# EAGLE board 00B-002-A1-01 (EAGLE 9.6.2)
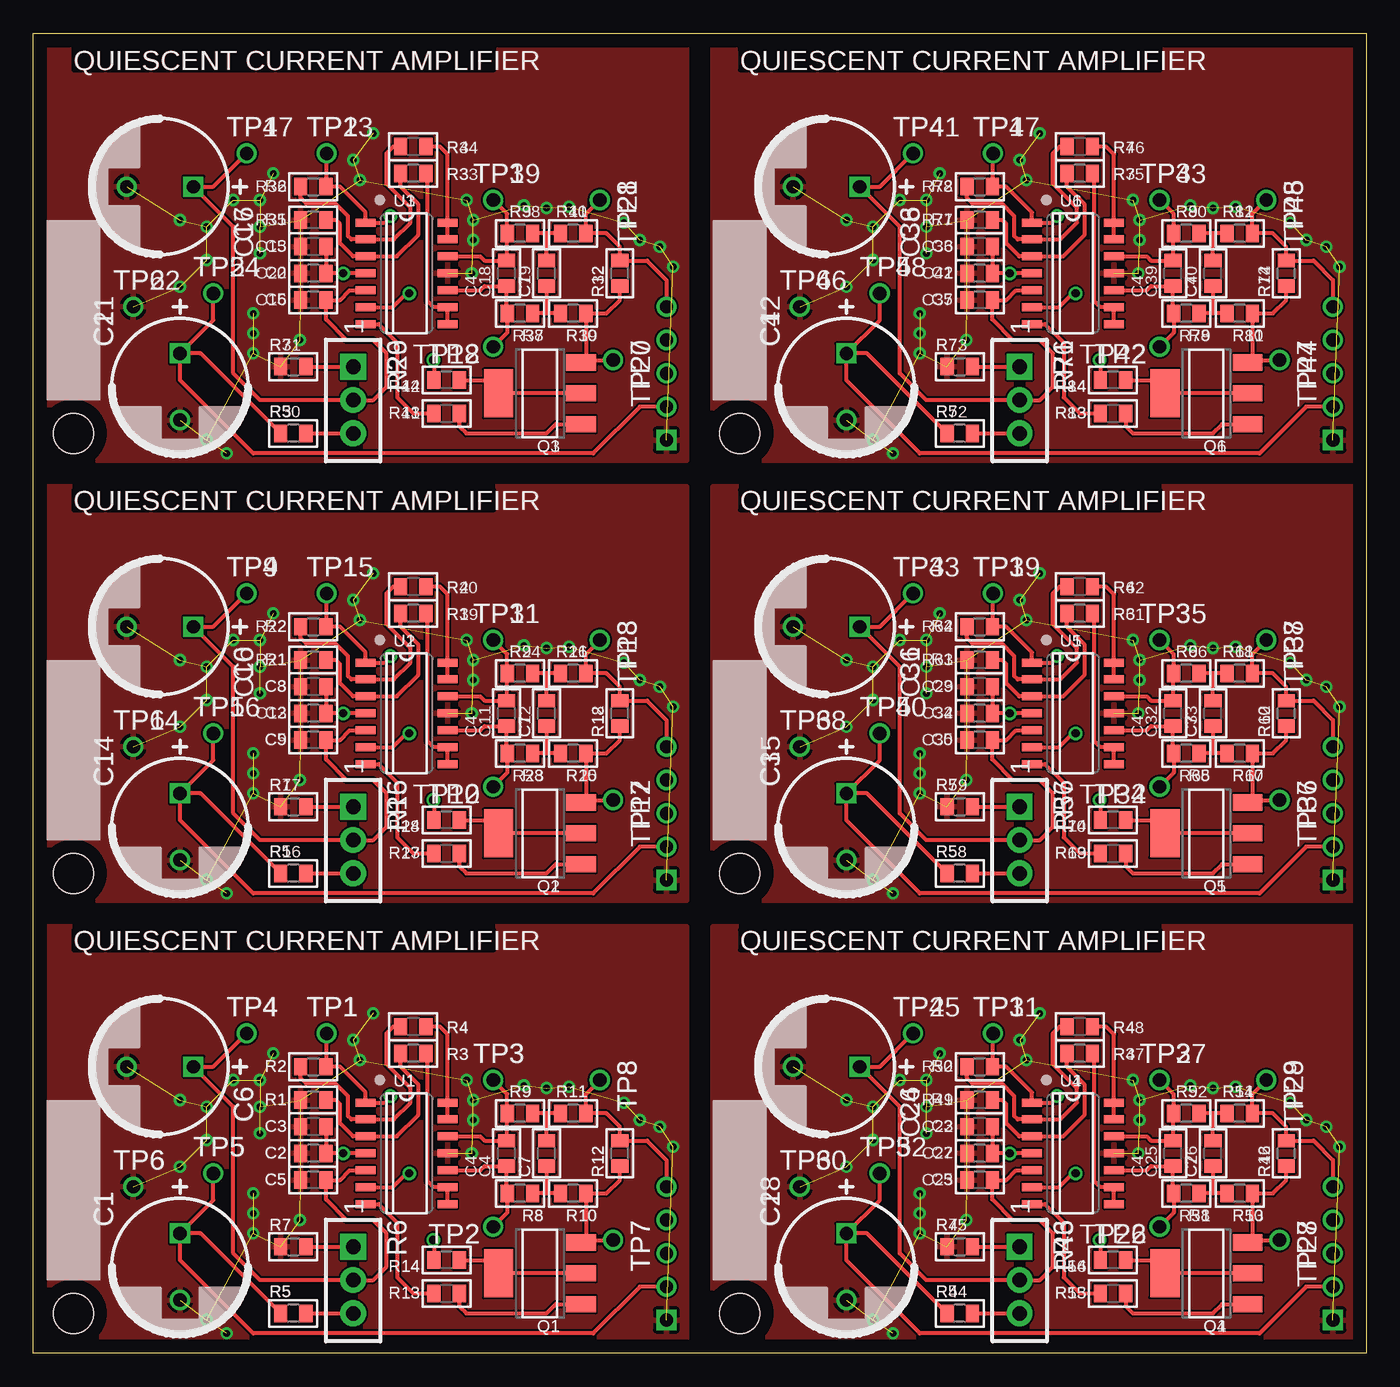
[diagram p0: board, top side]
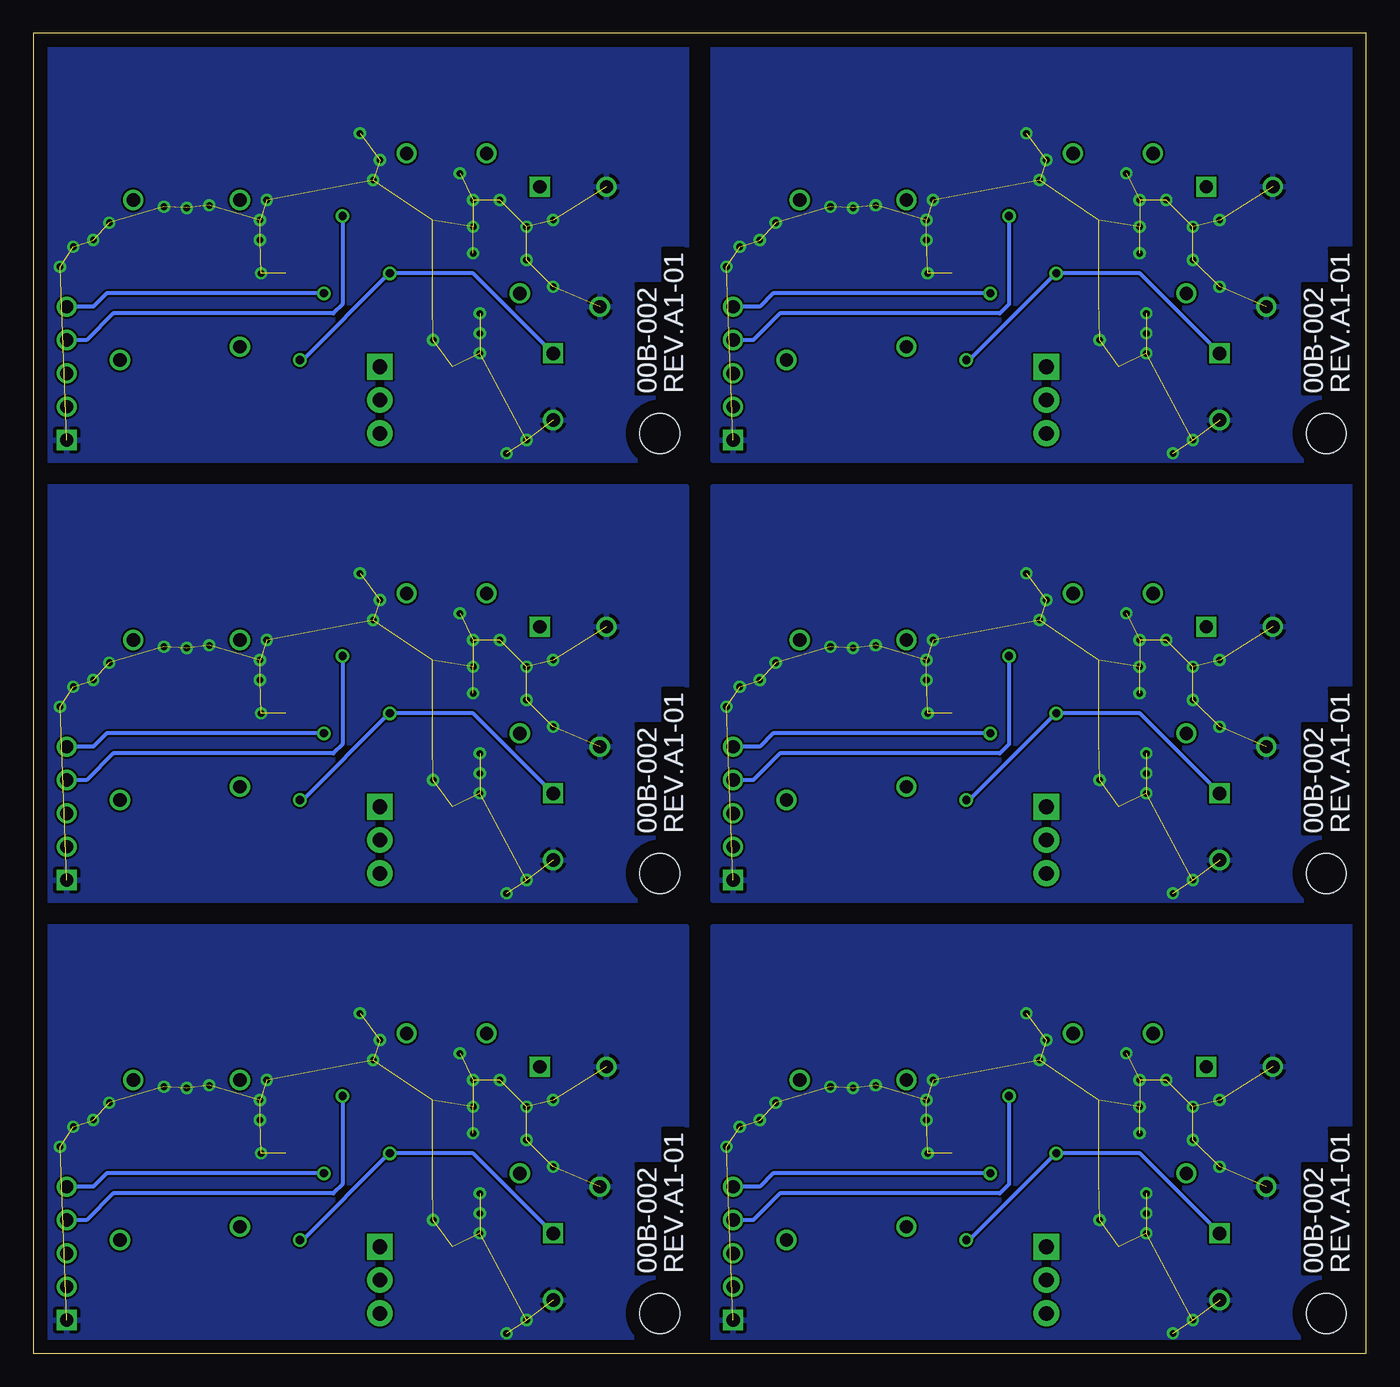
[diagram p1: board, bottom side, seen from below]

Size 100 x 99 mm. Coordinates in mm from the lower left corner, seen from the top.
Outline: 0,0 0,99 100,99 100,0 0,0
Copper layers (1*16): Top 0.035mm / dielectric 1.5mm / Bottom 0.035mm
Design rules "default": minimum track width 6mil, minimum drill 0.35mm, track to track 6mil, track to pad 6mil, pad to pad 6mil, via to via 6mil, smd to smd 6mil, copper to edge 40mil, drill to drill 6mil, minimum pad ring 10mil, minimum via ring 8mil, stop-mask expansion 4mil, vias tented up to drill 0mil, thermal gap 10mil

## Footprints (pad centres in the part's own frame; a part is rotated, then mirrored left to right if it is on the bottom)
C5MM = drill 1 square: + -2.5,0 | drill 1: - 2.5,0
C0805 = smd 1 x 1.3: 1 -0.95,0; 2 0.95,0
PINS_1X5 = drill 1 square: 1 0,0 | drill 1: 2 2.5,0; 3 5,0; 4 7.5,0; 5 10,0
MINIPCB_0P_33X50 = hole 3: 3,3
SOT223 = smd 1.219 x 2.235: 1 -2.311,-3.099; 2 0,-3.099; 3 2.311,-3.099 | smd 3.6 x 2.2: 4.TAB 0,3.099
R0805 = smd 1 x 1.3: 1 -0.95,0; 2 0.95,0
TRIM_0100 = drill 1.1 pad 1.93 square: 1 0,0 | drill 1.1 pad 1.93: 2 2.5,0; 3 5,0
PINS_1_TESTPOINT_KE5000_NOTEXT = drill 1: 1 0,0
SO14 = smd 0.6 x 1.5: 1 -3.81,-3.073; 2 -2.54,-3.073; 3 -1.27,-3.073; 4 0,-3.073; 5 1.27,-3.073; 6 2.54,-3.073; 7 3.81,-3.073; 8 3.81,3.073; 9 2.54,3.073; 10 1.27,3.073; 11 0,3.073; 12 -1.27,3.073; 13 -2.54,3.073; 14 -3.81,3.073

## Placement (x,y rotation side)
C1  1u  [C5MM]  11,6.5 270 top
C2  1u  [C0805]  21,15 180 top
C3  1u  [C0805]  21,17 180 top
C4  [C0805]  35.5,15 90 top
C5  [C0805]  21,13 180 top
C6  [C5MM]  9.5,21.5 180 top
C7  [C0805]  38.5,15 90 top
C8  1u  [C0805]  21,50 180 top
C9  [C0805]  21,46 180 top
C10  [C5MM]  9.5,54.5 180 top
C11  [C0805]  35.5,48 90 top
C12  [C0805]  38.5,48 90 top
C13  1u  [C0805]  21,48 180 top
C14  1u  [C5MM]  11,39.5 270 top
C15  1u  [C0805]  21,83 180 top
C16  [C0805]  21,79 180 top
C17  [C5MM]  9.5,87.5 180 top
C18  [C0805]  35.5,81 90 top
C19  [C0805]  38.5,81 90 top
C20  1u  [C0805]  21,81 180 top
C21  1u  [C5MM]  11,72.5 270 top
C22  1u  [C0805]  71,17 180 top
C23  [C0805]  71,13 180 top
C24  [C5MM]  59.5,21.5 180 top
C25  [C0805]  85.5,15 90 top
C26  [C0805]  88.5,15 90 top
C27  1u  [C0805]  71,15 180 top
C28  1u  [C5MM]  61,6.5 270 top
C29  1u  [C0805]  71,50 180 top
C30  [C0805]  71,46 180 top
C31  [C5MM]  59.5,54.5 180 top
C32  [C0805]  85.5,48 90 top
C33  [C0805]  88.5,48 90 top
C34  1u  [C0805]  71,48 180 top
C35  1u  [C5MM]  61,39.5 270 top
C36  1u  [C0805]  71,83 180 top
C37  [C0805]  71,79 180 top
C38  [C5MM]  59.5,87.5 180 top
C39  [C0805]  85.5,81 90 top
C40  [C0805]  88.5,81 90 top
C41  1u  [C0805]  71,81 180 top
C42  1u  [C5MM]  61,72.5 270 top
P1  [PINS_1X5]  47.5,2.5 90 top
P2  [PINS_1X5]  47.5,35.5 90 top
P3  [PINS_1X5]  47.5,68.5 90 top
P4  [PINS_1X5]  97.5,2.5 90 top
P5  [PINS_1X5]  97.5,35.5 90 top
P6  [PINS_1X5]  97.5,68.5 90 top
PCB1  [MINIPCB_0P_33X50]  0,0 0 top
PCB2  [MINIPCB_0P_33X50]  0,33 0 top
PCB3  [MINIPCB_0P_33X50]  0,66 0 top
PCB4  [MINIPCB_0P_33X50]  50,0 0 top
PCB5  [MINIPCB_0P_33X50]  50,33 0 top
PCB6  [MINIPCB_0P_33X50]  50,66 0 top
Q1  [SOT223]  38,6 90 top
Q2  [SOT223]  38,39 90 top
Q3  [SOT223]  38,72 90 top
Q4  [SOT223]  88,6 90 top
Q5  [SOT223]  88,39 90 top
Q6  [SOT223]  88,72 90 top
R1  [R0805]  21,19 180 top
R2  [R0805]  21,21.5 0 top
R3  [R0805]  28.5,22.5 180 top
R4  [R0805]  28.5,24.5 180 top
R5  [R0805]  19.5,3 180 top
R6  [TRIM_0100]  24,8 270 top
R7  [R0805]  19.5,8 0 top
R8  [R0805]  36.5,12 180 top
R9  [R0805]  36.5,18 180 top
R10  [R0805]  40.5,12 180 top
R11  [R0805]  40.5,18 180 top
R12  [R0805]  44,15 90 top
R13  [R0805]  31,4.5 0 top
R14  [R0805]  31,7 180 top
R15  [TRIM_0100]  24,41 270 top
R16  [R0805]  19.5,36 180 top
R17  [R0805]  19.5,41 0 top
R18  [R0805]  44,48 90 top
R19  [R0805]  28.5,55.5 180 top
R20  [R0805]  28.5,57.5 180 top
R21  [R0805]  21,52 180 top
R22  [R0805]  21,54.5 0 top
R23  [R0805]  36.5,45 180 top
R24  [R0805]  36.5,51 180 top
R25  [R0805]  40.5,45 180 top
R26  [R0805]  40.5,51 180 top
R27  [R0805]  31,37.5 0 top
R28  [R0805]  31,40 180 top
R29  [TRIM_0100]  24,74 270 top
R30  [R0805]  19.5,69 180 top
R31  [R0805]  19.5,74 0 top
R32  [R0805]  44,81 90 top
R33  [R0805]  28.5,88.5 180 top
R34  [R0805]  28.5,90.5 180 top
R35  [R0805]  21,85 180 top
R36  [R0805]  21,87.5 0 top
R37  [R0805]  36.5,78 180 top
R38  [R0805]  36.5,84 180 top
R39  [R0805]  40.5,78 180 top
R40  [R0805]  40.5,84 180 top
R41  [R0805]  31,70.5 0 top
R42  [R0805]  31,73 180 top
R43  [TRIM_0100]  74,8 270 top
R44  [R0805]  69.5,3 180 top
R45  [R0805]  69.5,8 0 top
R46  [R0805]  94,15 90 top
R47  [R0805]  78.5,22.5 180 top
R48  [R0805]  78.5,24.5 180 top
R49  [R0805]  71,19 180 top
R50  [R0805]  71,21.5 0 top
R51  [R0805]  86.5,12 180 top
R52  [R0805]  86.5,18 180 top
R53  [R0805]  90.5,12 180 top
R54  [R0805]  90.5,18 180 top
R55  [R0805]  81,4.5 0 top
R56  [R0805]  81,7 180 top
R57  [TRIM_0100]  74,41 270 top
R58  [R0805]  69.5,36 180 top
R59  [R0805]  69.5,41 0 top
R60  [R0805]  94,48 90 top
R61  [R0805]  78.5,55.5 180 top
R62  [R0805]  78.5,57.5 180 top
R63  [R0805]  71,52 180 top
R64  [R0805]  71,54.5 0 top
R65  [R0805]  86.5,45 180 top
R66  [R0805]  86.5,51 180 top
R67  [R0805]  90.5,45 180 top
R68  [R0805]  90.5,51 180 top
R69  [R0805]  81,37.5 0 top
R70  [R0805]  81,40 180 top
R71  [TRIM_0100]  74,74 270 top
R72  [R0805]  69.5,69 180 top
R73  [R0805]  69.5,74 0 top
R74  [R0805]  94,81 90 top
R75  [R0805]  78.5,88.5 180 top
R76  [R0805]  78.5,90.5 180 top
R77  [R0805]  71,85 180 top
R78  [R0805]  71,87.5 0 top
R79  [R0805]  86.5,78 180 top
R80  [R0805]  86.5,84 180 top
R81  [R0805]  90.5,78 180 top
R82  [R0805]  90.5,84 180 top
R83  [R0805]  81,70.5 0 top
R84  [R0805]  81,73 180 top
TP1  [PINS_1_TESTPOINT_KE5000_NOTEXT]  22,24 0 top
TP2  [PINS_1_TESTPOINT_KE5000_NOTEXT]  34.5,9.5 180 top
TP3  [PINS_1_TESTPOINT_KE5000_NOTEXT]  34.5,20.5 0 top
TP4  [PINS_1_TESTPOINT_KE5000_NOTEXT]  16,24 0 top
TP5  [PINS_1_TESTPOINT_KE5000_NOTEXT]  13.5,13.5 0 top
TP6  [PINS_1_TESTPOINT_KE5000_NOTEXT]  7.5,12.5 0 top
TP7  [PINS_1_TESTPOINT_KE5000_NOTEXT]  43.5,8.5 270 top
TP8  [PINS_1_TESTPOINT_KE5000_NOTEXT]  42.5,20.5 270 top
TP9  [PINS_1_TESTPOINT_KE5000_NOTEXT]  16,57 0 top
TP10  [PINS_1_TESTPOINT_KE5000_NOTEXT]  34.5,42.5 180 top
TP11  [PINS_1_TESTPOINT_KE5000_NOTEXT]  34.5,53.5 0 top
TP12  [PINS_1_TESTPOINT_KE5000_NOTEXT]  43.5,41.5 270 top
TP13  [PINS_1_TESTPOINT_KE5000_NOTEXT]  42.5,53.5 270 top
TP14  [PINS_1_TESTPOINT_KE5000_NOTEXT]  7.5,45.5 0 top
TP15  [PINS_1_TESTPOINT_KE5000_NOTEXT]  22,57 0 top
TP16  [PINS_1_TESTPOINT_KE5000_NOTEXT]  13.5,46.5 0 top
TP17  [PINS_1_TESTPOINT_KE5000_NOTEXT]  16,90 0 top
TP18  [PINS_1_TESTPOINT_KE5000_NOTEXT]  34.5,75.5 180 top
TP19  [PINS_1_TESTPOINT_KE5000_NOTEXT]  34.5,86.5 0 top
TP20  [PINS_1_TESTPOINT_KE5000_NOTEXT]  43.5,74.5 270 top
TP21  [PINS_1_TESTPOINT_KE5000_NOTEXT]  42.5,86.5 270 top
TP22  [PINS_1_TESTPOINT_KE5000_NOTEXT]  7.5,78.5 0 top
TP23  [PINS_1_TESTPOINT_KE5000_NOTEXT]  22,90 0 top
TP24  [PINS_1_TESTPOINT_KE5000_NOTEXT]  13.5,79.5 0 top
TP25  [PINS_1_TESTPOINT_KE5000_NOTEXT]  66,24 0 top
TP26  [PINS_1_TESTPOINT_KE5000_NOTEXT]  84.5,9.5 180 top
TP27  [PINS_1_TESTPOINT_KE5000_NOTEXT]  84.5,20.5 0 top
TP28  [PINS_1_TESTPOINT_KE5000_NOTEXT]  93.5,8.5 270 top
TP29  [PINS_1_TESTPOINT_KE5000_NOTEXT]  92.5,20.5 270 top
TP30  [PINS_1_TESTPOINT_KE5000_NOTEXT]  57.5,12.5 0 top
TP31  [PINS_1_TESTPOINT_KE5000_NOTEXT]  72,24 0 top
TP32  [PINS_1_TESTPOINT_KE5000_NOTEXT]  63.5,13.5 0 top
TP33  [PINS_1_TESTPOINT_KE5000_NOTEXT]  66,57 0 top
TP34  [PINS_1_TESTPOINT_KE5000_NOTEXT]  84.5,42.5 180 top
TP35  [PINS_1_TESTPOINT_KE5000_NOTEXT]  84.5,53.5 0 top
TP36  [PINS_1_TESTPOINT_KE5000_NOTEXT]  93.5,41.5 270 top
TP37  [PINS_1_TESTPOINT_KE5000_NOTEXT]  92.5,53.5 270 top
TP38  [PINS_1_TESTPOINT_KE5000_NOTEXT]  57.5,45.5 0 top
TP39  [PINS_1_TESTPOINT_KE5000_NOTEXT]  72,57 0 top
TP40  [PINS_1_TESTPOINT_KE5000_NOTEXT]  63.5,46.5 0 top
TP41  [PINS_1_TESTPOINT_KE5000_NOTEXT]  66,90 0 top
TP42  [PINS_1_TESTPOINT_KE5000_NOTEXT]  84.5,75.5 180 top
TP43  [PINS_1_TESTPOINT_KE5000_NOTEXT]  84.5,86.5 0 top
TP44  [PINS_1_TESTPOINT_KE5000_NOTEXT]  93.5,74.5 270 top
TP45  [PINS_1_TESTPOINT_KE5000_NOTEXT]  92.5,86.5 270 top
TP46  [PINS_1_TESTPOINT_KE5000_NOTEXT]  57.5,78.5 0 top
TP47  [PINS_1_TESTPOINT_KE5000_NOTEXT]  72,90 0 top
TP48  [PINS_1_TESTPOINT_KE5000_NOTEXT]  63.5,79.5 0 top
U1  324  [SO14]  28,15 270 top
U2  324  [SO14]  28,48 270 top
U3  324  [SO14]  28,81 270 top
U4  324  [SO14]  78,15 270 top
U5  324  [SO14]  78,48 270 top
U6  324  [SO14]  78,81 270 top

## Library data of the parts
C1-C42 P1-P6 Q1-Q6 R1-R84 TP1-TP48 U1-U6 = minipcb
PCB1-PCB6 = minipcb; PART_NUMBER: 00B-002; REVISION: A1-01; TITLE: QUIESCENT CURRENT AMPLIFIER

## Nets
GND: C1.- C2.2 C3.2 C5.2 C6.- P1.1 R1.2 R7.1 TP6.1 U1.11
GND1: C8.2 C9.2 C10.- C13.2 C14.- P2.1 R17.1 R21.2 TP14.1 U2.11
GND2: C15.2 C16.2 C17.- C20.2 C21.- P3.1 R31.1 R35.2 TP22.1 U3.11
GND3: C22.2 C23.2 C24.- C27.2 C28.- P4.1 R45.1 R49.2 TP30.1 U4.11
GND4: C29.2 C30.2 C31.- C34.2 C35.- P5.1 R59.1 R63.2 TP38.1 U5.11
GND5: C36.2 C37.2 C38.- C41.2 C42.- P6.1 R73.1 R77.2 TP46.1 U6.11
ISIGNAL: P1.4 R2.2 TP1.1 U1.1
ISIGNAL1: P2.4 R22.2 TP15.1 U2.1
ISIGNAL2: P3.4 R36.2 TP23.1 U3.1
ISIGNAL3: P4.4 R50.2 TP31.1 U4.1
ISIGNAL4: P5.4 R64.2 TP39.1 U5.1
ISIGNAL5: P6.4 R78.2 TP47.1 U6.1
N$1: Q1.2 Q1.4.TAB R14.1
N$2: R3.1 U1.8 U1.9
N$3: R4.1 U1.13 U1.14
N$4: Q1.1 R13.2
N$5: R6.1 R7.2
N$6: R5.1 R6.3
N$7: R13.1 U1.7
N$8: R2.1 R4.2 U1.2
N$9: R1.1 R3.2 U1.3
N$10: R15.1 R17.2
N$11: R15.3 R16.1
N$12: R19.1 U2.8 U2.9
N$13: R20.1 U2.13 U2.14
N$14: C4.1 R8.2 TP2.1 U1.10
N$15: C4.2 R9.2 TP3.1 U1.12
N$16: C7.1 R8.1 R10.2
N$17: C7.2 R9.1 R11.2
N$18: R20.2 R22.1 U2.2
N$19: R19.2 R21.1 U2.3
N$20: C11.1 R23.2 TP10.1 U2.10
N$21: C11.2 R24.2 TP11.1 U2.12
N$22: C12.1 R23.1 R25.2
N$23: C12.2 R24.1 R26.2
N$24: Q2.1 R27.2
N$25: R27.1 U2.7
N$26: Q2.2 Q2.4.TAB R28.1
N$27: R29.1 R31.2
N$28: R29.3 R30.1
N$29: R33.1 U3.8 U3.9
N$30: R34.1 U3.13 U3.14
N$31: R34.2 R36.1 U3.2
N$32: R33.2 R35.1 U3.3
N$33: C18.1 R37.2 TP18.1 U3.10
N$34: C18.2 R38.2 TP19.1 U3.12
N$35: C19.1 R37.1 R39.2
N$36: C19.2 R38.1 R40.2
N$37: Q3.1 R41.2
N$38: R41.1 U3.7
N$39: Q3.2 Q3.4.TAB R42.1
N$40: R43.1 R45.2
N$41: R43.3 R44.1
N$42: R47.1 U4.8 U4.9
N$43: R48.1 U4.13 U4.14
N$44: R48.2 R50.1 U4.2
N$45: R47.2 R49.1 U4.3
N$46: C25.1 R51.2 TP26.1 U4.10
N$47: C25.2 R52.2 TP27.1 U4.12
N$48: C26.1 R51.1 R53.2
N$49: C26.2 R52.1 R54.2
N$50: Q4.1 R55.2
N$51: R55.1 U4.7
N$52: Q4.2 Q4.4.TAB R56.1
N$53: R57.1 R59.2
N$54: R57.3 R58.1
N$55: R61.1 U5.8 U5.9
N$56: R62.1 U5.13 U5.14
N$57: R62.2 R64.1 U5.2
N$58: R61.2 R63.1 U5.3
N$59: C32.1 R65.2 TP34.1 U5.10
N$60: C32.2 R66.2 TP35.1 U5.12
N$61: C33.1 R65.1 R67.2
N$62: C33.2 R66.1 R68.2
N$63: Q5.1 R69.2
N$64: R69.1 U5.7
N$65: Q5.2 Q5.4.TAB R70.1
N$66: R71.1 R73.2
N$67: R71.3 R72.1
N$68: R75.1 U6.8 U6.9
N$69: R76.1 U6.13 U6.14
N$70: R76.2 R78.1 U6.2
N$71: R75.2 R77.1 U6.3
N$72: C39.1 R79.2 TP42.1 U6.10
N$73: C39.2 R80.2 TP43.1 U6.12
N$74: C40.1 R79.1 R81.2
N$75: C40.2 R80.1 R82.2
N$76: Q6.1 R83.2
N$77: R83.1 U6.7
N$78: Q6.2 Q6.4.TAB R84.1
V+: C1.+ C2.1 C3.1 P1.2 R5.2 R14.2 TP5.1 U1.4
V+1: C8.1 C13.1 C14.+ P2.2 R16.2 R28.2 TP16.1 U2.4
V+2: C15.1 C20.1 C21.+ P3.2 R30.2 R42.2 TP24.1 U3.4
V+3: C22.1 C27.1 C28.+ P4.2 R44.2 R56.2 TP32.1 U4.4
V+4: C29.1 C34.1 C35.+ P5.2 R58.2 R70.2 TP40.1 U5.4
V+5: C36.1 C41.1 C42.+ P6.2 R72.2 R84.2 TP48.1 U6.4
VOUT: P1.5 R11.1 R12.2 TP8.1 U1.6
VOUT1: P2.5 R18.2 R26.1 TP13.1 U2.6
VOUT2: P3.5 R32.2 R40.1 TP21.1 U3.6
VOUT3: P4.5 R46.2 R54.1 TP29.1 U4.6
VOUT4: P5.5 R60.2 R68.1 TP37.1 U5.6
VOUT5: P6.5 R74.2 R82.1 TP45.1 U6.6
VREF: C5.1 C6.+ R6.2 TP4.1 U1.5
VREF1: C9.1 C10.+ R15.2 TP9.1 U2.5
VREF2: C16.1 C17.+ R29.2 TP17.1 U3.5
VREF3: C23.1 C24.+ R43.2 TP25.1 U4.5
VREF4: C30.1 C31.+ R57.2 TP33.1 U5.5
VREF5: C37.1 C38.+ R71.2 TP41.1 U6.5
VSIGAL: Q1.3 R10.1 R12.1 TP7.1
VSIGAL1: Q2.3 R18.1 R25.1 TP12.1
VSIGAL2: Q3.3 R32.1 R39.1 TP20.1
VSIGAL3: Q4.3 R46.1 R53.1 TP28.1
VSIGAL4: Q5.3 R60.1 R67.1 TP36.1
VSIGAL5: Q6.3 R74.1 R81.1 TP44.1

## Tracks (layer width: path | path; a pad name or v marks a point on that pad's centre or on a via)
GND  (via drill 0.5)  (38 unrouted)
  other vias: 32.9,15 20,10 16.5,9 16.5,10.5 16.5,12 17,16.5 17,18.5 11,19 13,18.5 13,16 11,14 18,22.5 17,20.5 15,20.5 24,23.5 24.5,22 25.5,25.5 33,17.5 33,19 32.5,20.5 36.8,20.1 38.5,19.9 40.2,20 44.3,18.8 45.5,17.5 47,17 48,15.5 14.5,1.5 13,2.5
  pour Top: 1,1 49,1 49,32 1,32
  pour Bottom: 1,1 49,1 49,32 1,32
GND1  (via drill 0.5)  (38 unrouted)
  other vias: 32.9,48 20,43 16.5,42 16.5,43.5 16.5,45 17,49.5 17,51.5 11,52 13,51.5 13,49 11,47 18,55.5 17,53.5 15,53.5 24,56.5 24.5,55 25.5,58.5 33,50.5 33,52 32.5,53.5 36.8,53.1 38.5,52.9 40.2,53 44.3,51.8 45.5,50.5 47,50 48,48.5 14.5,34.5 13,35.5
  pour Top: 1,34 49,34 49,65 1,65
  pour Bottom: 1,34 49,34 49,65 1,65
GND2  (via drill 0.5)  (38 unrouted)
  other vias: 32.9,81 20,76 16.5,75 16.5,76.5 16.5,78 17,82.5 17,84.5 11,85 13,84.5 13,82 11,80 18,88.5 17,86.5 15,86.5 24,89.5 24.5,88 25.5,91.5 33,83.5 33,85 32.5,86.5 36.8,86.1 38.5,85.9 40.2,86 44.3,84.8 45.5,83.5 47,83 48,81.5 14.5,67.5 13,68.5
  pour Top: 1,67 49,67 49,98 1,98
  pour Bottom: 1,67 49,67 49,98 1,98
GND3  (via drill 0.5)  (38 unrouted)
  other vias: 82.9,15 70,10 66.5,9 66.5,10.5 66.5,12 67,16.5 67,18.5 61,19 63,18.5 63,16 61,14 68,22.5 67,20.5 65,20.5 74,23.5 74.5,22 75.5,25.5 83,17.5 83,19 82.5,20.5 86.8,20.1 88.5,19.9 90.2,20 94.3,18.8 95.5,17.5 97,17 98,15.5 64.5,1.5 63,2.5
  pour Top: 51,1 99,1 99,32 51,32
  pour Bottom: 51,1 99,1 99,32 51,32
GND4  (via drill 0.5)  (38 unrouted)
  other vias: 82.9,48 70,43 66.5,42 66.5,43.5 66.5,45 67,49.5 67,51.5 61,52 63,51.5 63,49 61,47 68,55.5 67,53.5 65,53.5 74,56.5 74.5,55 75.5,58.5 83,50.5 83,52 82.5,53.5 86.8,53.1 88.5,52.9 90.2,53 94.3,51.8 95.5,50.5 97,50 98,48.5 64.5,34.5 63,35.5
  pour Top: 51,34 99,34 99,65 51,65
  pour Bottom: 51,34 99,34 99,65 51,65
GND5  (via drill 0.5)  (38 unrouted)
  other vias: 82.9,81 70,76 66.5,75 66.5,76.5 66.5,78 67,82.5 67,84.5 61,85 63,84.5 63,82 61,80 68,88.5 67,86.5 65,86.5 74,89.5 74.5,88 75.5,91.5 83,83.5 83,85 82.5,86.5 86.8,86.1 88.5,85.9 90.2,86 94.3,84.8 95.5,83.5 97,83 98,81.5 64.5,67.5 63,68.5
  pour Top: 51,67 99,67 99,98 51,98
  pour Bottom: 51,67 99,67 99,98 51,98
ISIGNAL  (via drill 0.61)
  Top 0.3: TP1.1 22,21.55 R2.2 23,21.5 24.93,19.57 U1.1 26.41,18.81 26.8,19.2 v26.8,19.3
  Bottom 0.3: v26.8,19.3 26.8,12.7 27.5,12 44,12 46,10 P1.4
ISIGNAL1  (via drill 0.61)
  Top 0.3: TP15.1 22,54.55 R22.2 23,54.5 24.93,52.57 U2.1 26.41,51.81 26.8,52.2 v26.8,52.3
  Bottom 0.3: v26.8,52.3 26.8,45.7 27.5,45 44,45 46,43 P2.4
ISIGNAL2  (via drill 0.61)
  Top 0.3: TP23.1 22,87.55 R36.2 23,87.5 24.93,85.57 U3.1 26.41,84.81 26.8,85.2 v26.8,85.3
  Bottom 0.3: v26.8,85.3 26.8,78.7 27.5,78 44,78 46,76 P3.4
ISIGNAL3  (via drill 0.61)
  Top 0.3: TP31.1 72,21.55 R50.2 73,21.5 74.93,19.57 U4.1 76.41,18.81 76.8,19.2 v76.8,19.3
  Bottom 0.3: v76.8,19.3 76.8,12.7 77.5,12 94,12 96,10 P4.4
ISIGNAL4  (via drill 0.61)
  Top 0.3: TP39.1 72,54.55 R64.2 73,54.5 74.93,52.57 U5.1 76.41,51.81 76.8,52.2 v76.8,52.3
  Bottom 0.3: v76.8,52.3 76.8,45.7 77.5,45 94,45 96,43 P5.4
ISIGNAL5  (via drill 0.61)
  Top 0.3: TP47.1 72,87.55 R78.2 73,87.5 74.93,85.57 U6.1 76.41,84.81 76.8,85.2 v76.8,85.3
  Bottom 0.3: v76.8,85.3 76.8,78.7 77.5,78 94,78 96,76 P6.4
N$1
  Top 0.3: R14.1 34.5,7 35,6.5 35,6.1 Q1.4.TAB Q1.2
N$2
  Top 0.3: U1.8 U1.9 30.04,12.46 29.55,12.95 29.55,22.4 R3.1
N$3
  Top 0.3: R4.1 30.5,24.5 31.07,23.93 U1.14 U1.13
N$4
  Top 0.3: R13.2 31.95,3.55 32.5,3 38.5,3 39.19,3.69 Q1.1
N$5
  Top 0.3: R7.2 R6.1
N$6
  Top 0.3: R5.1 R6.3
N$7
  Top 0.3: U1.7 25.91,11.19 27.3,9.8 27.3,5.7 28.5,4.5 R13.1
N$8
  Top 0.3: R2.1 20.05,20.65 20.45,20.25 22.65,20.25 23.6,19.3 23.6,17.8 23.86,17.54 U1.2 27.04,17.54 28.3,18.8 28.3,19.9 26.5,21.7 26.5,24 27,24.5 R4.2
N$9
  Top 0.3: R1.1 22.7,19 23,18.7 23,17.25 23.98,16.27 U1.3 27.27,16.27 28.85,17.85 28.85,20.2 27.55,21.5 R3.2
N$10
  Top 0.3: R17.2 R15.1
N$11
  Top 0.3: R16.1 R15.3
N$12
  Top 0.3: U2.8 U2.9 30.04,45.46 29.55,45.95 29.55,55.4 R19.1
N$13
  Top 0.3: R20.1 30.5,57.5 31.07,56.93 U2.14 U2.13
N$14
  Top 0.3: TP2.1 35.55,10.55 R8.2 35.5,12.05 C4.1 33.85,14.05 33.53,13.73 U1.10
N$15
  Top 0.3: TP3.1 35.55,19.45 R9.2 35.5,17.95 C4.2 33.85,15.95 33.53,16.27 U1.12
N$16
  Top 0.3: R10.2 38.5,12 | 38.5,12 R8.1 | C7.1 38.5,12
N$17
  Top 0.3: R11.2 38.5,18 | 38.5,18 R9.1 | C7.2 38.5,18
N$18
  Top 0.3: R22.1 20.05,53.65 20.45,53.25 22.65,53.25 23.6,52.3 23.6,50.8 23.86,50.54 U2.2 27.04,50.54 28.3,51.8 28.3,52.9 26.5,54.7 26.5,57 27,57.5 R20.2
N$19
  Top 0.3: R21.1 22.7,52 23,51.7 23,50.25 23.98,49.27 U2.3 27.27,49.27 28.85,50.85 28.85,53.2 27.55,54.5 R19.2
N$20
  Top 0.3: TP10.1 35.55,43.55 R23.2 35.5,45.05 C11.1 33.85,47.05 33.53,46.73 U2.10
N$21
  Top 0.3: TP11.1 35.55,52.45 R24.2 35.5,50.95 C11.2 33.85,48.95 33.53,49.27 U2.12
N$22
  Top 0.3: R25.2 38.5,45 | 38.5,45 R23.1 | C12.1 38.5,45
N$23
  Top 0.3: R26.2 38.5,51 | 38.5,51 R24.1 | C12.2 38.5,51
N$24
  Top 0.3: R27.2 31.95,36.55 32.5,36 38.5,36 39.19,36.69 Q2.1
N$25
  Top 0.3: U2.7 25.91,44.19 27.3,42.8 27.3,38.7 28.5,37.5 R27.1
N$26
  Top 0.3: R28.1 34.5,40 35,39.5 35,39.1 Q2.4.TAB Q2.2
N$27
  Top 0.3: R31.2 R29.1
N$28
  Top 0.3: R30.1 R29.3
N$29
  Top 0.3: U3.8 U3.9 30.04,78.46 29.55,78.95 29.55,88.4 R33.1
N$30
  Top 0.3: R34.1 30.5,90.5 31.07,89.93 U3.14 U3.13
N$31
  Top 0.3: R36.1 20.05,86.65 20.45,86.25 22.65,86.25 23.6,85.3 23.6,83.8 23.86,83.54 U3.2 27.04,83.54 28.3,84.8 28.3,85.9 26.5,87.7 26.5,90 27,90.5 R34.2
N$32
  Top 0.3: R35.1 22.7,85 23,84.7 23,83.25 23.98,82.27 U3.3 27.27,82.27 28.85,83.85 28.85,86.2 27.55,87.5 R33.2
N$33
  Top 0.3: TP18.1 35.55,76.55 R37.2 35.5,78.05 C18.1 33.85,80.05 33.53,79.73 U3.10
N$34
  Top 0.3: TP19.1 35.55,85.45 R38.2 35.5,83.95 C18.2 33.85,81.95 33.53,82.27 U3.12
N$35
  Top 0.3: R39.2 38.5,78 | 38.5,78 R37.1 | C19.1 38.5,78
N$36
  Top 0.3: R40.2 38.5,84 | 38.5,84 R38.1 | C19.2 38.5,84
N$37
  Top 0.3: R41.2 31.95,69.55 32.5,69 38.5,69 39.19,69.69 Q3.1
N$38
  Top 0.3: U3.7 25.91,77.19 27.3,75.8 27.3,71.7 28.5,70.5 R41.1
N$39
  Top 0.3: R42.1 34.5,73 35,72.5 35,72.1 Q3.4.TAB Q3.2
N$40
  Top 0.3: R45.2 R43.1
N$41
  Top 0.3: R44.1 R43.3
N$42
  Top 0.3: U4.8 U4.9 80.04,12.46 79.55,12.95 79.55,22.4 R47.1
N$43
  Top 0.3: R48.1 80.5,24.5 81.07,23.93 U4.14 U4.13
N$44
  Top 0.3: R50.1 70.05,20.65 70.45,20.25 72.65,20.25 73.6,19.3 73.6,17.8 73.86,17.54 U4.2 77.04,17.54 78.3,18.8 78.3,19.9 76.5,21.7 76.5,24 77,24.5 R48.2
N$45
  Top 0.3: R49.1 72.7,19 73,18.7 73,17.25 73.98,16.27 U4.3 77.27,16.27 78.85,17.85 78.85,20.2 77.55,21.5 R47.2
N$46
  Top 0.3: TP26.1 85.55,10.55 R51.2 85.5,12.05 C25.1 83.85,14.05 83.53,13.73 U4.10
N$47
  Top 0.3: TP27.1 85.55,19.45 R52.2 85.5,17.95 C25.2 83.85,15.95 83.53,16.27 U4.12
N$48
  Top 0.3: R53.2 88.5,12 | 88.5,12 R51.1 | C26.1 88.5,12
N$49
  Top 0.3: R54.2 88.5,18 | 88.5,18 R52.1 | C26.2 88.5,18
N$50
  Top 0.3: R55.2 81.95,3.55 82.5,3 88.5,3 89.19,3.69 Q4.1
N$51
  Top 0.3: U4.7 75.91,11.19 77.3,9.8 77.3,5.7 78.5,4.5 R55.1
N$52
  Top 0.3: R56.1 84.5,7 85,6.5 85,6.1 Q4.4.TAB Q4.2
N$53
  Top 0.3: R59.2 R57.1
N$54
  Top 0.3: R58.1 R57.3
N$55
  Top 0.3: U5.8 U5.9 80.04,45.46 79.55,45.95 79.55,55.4 R61.1
N$56
  Top 0.3: R62.1 80.5,57.5 81.07,56.93 U5.14 U5.13
N$57
  Top 0.3: R64.1 70.05,53.65 70.45,53.25 72.65,53.25 73.6,52.3 73.6,50.8 73.86,50.54 U5.2 77.04,50.54 78.3,51.8 78.3,52.9 76.5,54.7 76.5,57 77,57.5 R62.2
N$58
  Top 0.3: R63.1 72.7,52 73,51.7 73,50.25 73.98,49.27 U5.3 77.27,49.27 78.85,50.85 78.85,53.2 77.55,54.5 R61.2
N$59
  Top 0.3: TP34.1 85.55,43.55 R65.2 85.5,45.05 C32.1 83.85,47.05 83.53,46.73 U5.10
N$60
  Top 0.3: TP35.1 85.55,52.45 R66.2 85.5,50.95 C32.2 83.85,48.95 83.53,49.27 U5.12
N$61
  Top 0.3: R67.2 88.5,45 | 88.5,45 R65.1 | C33.1 88.5,45
N$62
  Top 0.3: R68.2 88.5,51 | 88.5,51 R66.1 | C33.2 88.5,51
N$63
  Top 0.3: R69.2 81.95,36.55 82.5,36 88.5,36 89.19,36.69 Q5.1
N$64
  Top 0.3: U5.7 75.91,44.19 77.3,42.8 77.3,38.7 78.5,37.5 R69.1
N$65
  Top 0.3: R70.1 84.5,40 85,39.5 85,39.1 Q5.4.TAB Q5.2
N$66
  Top 0.3: R73.2 R71.1
N$67
  Top 0.3: R72.1 R71.3
N$68
  Top 0.3: U6.8 U6.9 80.04,78.46 79.55,78.95 79.55,88.4 R75.1
N$69
  Top 0.3: R76.1 80.5,90.5 81.07,89.93 U6.14 U6.13
N$70
  Top 0.3: R78.1 70.05,86.65 70.45,86.25 72.65,86.25 73.6,85.3 73.6,83.8 73.86,83.54 U6.2 77.04,83.54 78.3,84.8 78.3,85.9 76.5,87.7 76.5,90 77,90.5 R76.2
N$71
  Top 0.3: R77.1 72.7,85 73,84.7 73,83.25 73.98,82.27 U6.3 77.27,82.27 78.85,83.85 78.85,86.2 77.55,87.5 R75.2
N$72
  Top 0.3: TP42.1 85.55,76.55 R79.2 85.5,78.05 C39.1 83.85,80.05 83.53,79.73 U6.10
N$73
  Top 0.3: TP43.1 85.55,85.45 R80.2 85.5,83.95 C39.2 83.85,81.95 83.53,82.27 U6.12
N$74
  Top 0.3: R81.2 88.5,78 | 88.5,78 R79.1 | C40.1 88.5,78
N$75
  Top 0.3: R82.2 88.5,84 | 88.5,84 R80.1 | C40.2 88.5,84
N$76
  Top 0.3: R83.2 81.95,69.55 82.5,69 88.5,69 89.19,69.69 Q6.1
N$77
  Top 0.3: U6.7 75.91,77.19 77.3,75.8 77.3,71.7 78.5,70.5 R83.1
N$78
  Top 0.3: R84.1 84.5,73 85,72.5 85,72.1 Q6.4.TAB Q6.2
V+  (via drill 0.61)
  Top 0.3: R5.2 12.55,9 C1.+ | C1.+ 13.5,11.5 TP5.1 | U1.4 v23.25,15 C2.1 C3.1 | v30,8.5 30.05,8.45 R14.2 | P1.2 45.5,5 42,1.5 16.5,1.5 11,7 C1.+
  Bottom 0.3: C1.+ 17,15 v23.25,15 23.3,15 29.8,8.5 v30,8.5
V+1  (via drill 0.61)
  Top 0.3: R16.2 12.55,42 C14.+ | C14.+ 13.5,44.5 TP16.1 | U2.4 v23.25,48 C13.1 C8.1 | v30,41.5 30.05,41.45 R28.2 | P2.2 45.5,38 42,34.5 16.5,34.5 11,40 C14.+
  Bottom 0.3: C14.+ 17,48 v23.25,48 23.3,48 29.8,41.5 v30,41.5
V+2  (via drill 0.61)
  Top 0.3: R30.2 12.55,75 C21.+ | C21.+ 13.5,77.5 TP24.1 | U3.4 v23.25,81 C20.1 C15.1 | v30,74.5 30.05,74.45 R42.2 | P3.2 45.5,71 42,67.5 16.5,67.5 11,73 C21.+
  Bottom 0.3: C21.+ 17,81 v23.25,81 23.3,81 29.8,74.5 v30,74.5
V+3  (via drill 0.61)
  Top 0.3: R44.2 62.55,9 C28.+ | C28.+ 63.5,11.5 TP32.1 | U4.4 v73.25,15 C27.1 C22.1 | v80,8.5 80.05,8.45 R56.2 | P4.2 95.5,5 92,1.5 66.5,1.5 61,7 C28.+
  Bottom 0.3: C28.+ 67,15 v73.25,15 73.3,15 79.8,8.5 v80,8.5
V+4  (via drill 0.61)
  Top 0.3: R58.2 62.55,42 C35.+ | C35.+ 63.5,44.5 TP40.1 | U5.4 v73.25,48 C34.1 C29.1 | v80,41.5 80.05,41.45 R70.2 | P5.2 95.5,38 92,34.5 66.5,34.5 61,40 C35.+
  Bottom 0.3: C35.+ 67,48 v73.25,48 73.3,48 79.8,41.5 v80,41.5
V+5  (via drill 0.61)
  Top 0.3: R72.2 62.55,75 C42.+ | C42.+ 63.5,77.5 TP48.1 | U6.4 v73.25,81 C41.1 C36.1 | v80,74.5 80.05,74.45 R84.2 | P6.2 95.5,71 92,67.5 66.5,67.5 61,73 C42.+
  Bottom 0.3: C42.+ 67,81 v73.25,81 73.3,81 79.8,74.5 v80,74.5
VOUT  (via drill 0.61)
  Top 0.3: TP8.1 41.45,19.45 R11.1 43,18 44,17 R12.2 46.05,15.95 47.5,14.5 P1.5 | U1.6 26.96,12.46 28,13.5 v28.2,13.5
  Bottom 0.3: v28.2,13.5 44.5,13.5 45.5,12.5 P1.5
VOUT1  (via drill 0.61)
  Top 0.3: TP13.1 41.45,52.45 R26.1 43,51 44,50 R18.2 46.05,48.95 47.5,47.5 P2.5 | U2.6 26.96,45.46 28,46.5 v28.2,46.5
  Bottom 0.3: v28.2,46.5 44.5,46.5 45.5,45.5 P2.5
VOUT2  (via drill 0.61)
  Top 0.3: TP21.1 41.45,85.45 R40.1 43,84 44,83 R32.2 46.05,81.95 47.5,80.5 P3.5 | U3.6 26.96,78.46 28,79.5 v28.2,79.5
  Bottom 0.3: v28.2,79.5 44.5,79.5 45.5,78.5 P3.5
VOUT3  (via drill 0.61)
  Top 0.3: TP29.1 91.45,19.45 R54.1 93,18 94,17 R46.2 96.05,15.95 97.5,14.5 P4.5 | U4.6 76.96,12.46 78,13.5 v78.2,13.5
  Bottom 0.3: v78.2,13.5 94.5,13.5 95.5,12.5 P4.5
VOUT4  (via drill 0.61)
  Top 0.3: TP37.1 91.45,52.45 R68.1 93,51 94,50 R60.2 96.05,48.95 97.5,47.5 P5.5 | U5.6 76.96,45.46 78,46.5 v78.2,46.5
  Bottom 0.3: v78.2,46.5 94.5,46.5 95.5,45.5 P5.5
VOUT5  (via drill 0.61)
  Top 0.3: TP45.1 91.45,85.45 R82.1 93,84 94,83 R74.2 96.05,81.95 97.5,80.5 P6.5 | U6.6 76.96,78.46 78,79.5 v78.2,79.5
  Bottom 0.3: v78.2,79.5 94.5,79.5 95.5,78.5 P6.5
VREF
  Top 0.3: TP4.1 13.5,21.5 C6.+ 15,18.5 15,7.5 17,5.5 R6.2 25.5,5.5 26.5,6.5 26.5,9 25.5,10 23.5,10 21.95,11.55 C5.1 23,13 23.73,13.73 U1.5
VREF1
  Top 0.3: TP9.1 13.5,54.5 C10.+ 15,51.5 15,40.5 17,38.5 R15.2 25.5,38.5 26.5,39.5 26.5,42 25.5,43 23.5,43 21.95,44.55 C9.1 23,46 23.73,46.73 U2.5
VREF2
  Top 0.3: TP17.1 13.5,87.5 C17.+ 15,84.5 15,73.5 17,71.5 R29.2 25.5,71.5 26.5,72.5 26.5,75 25.5,76 23.5,76 21.95,77.55 C16.1 23,79 23.73,79.73 U3.5
VREF3
  Top 0.3: TP25.1 63.5,21.5 C24.+ 65,18.5 65,7.5 67,5.5 R43.2 75.5,5.5 76.5,6.5 76.5,9 75.5,10 73.5,10 71.95,11.55 C23.1 73,13 73.73,13.73 U4.5
VREF4
  Top 0.3: TP33.1 63.5,54.5 C31.+ 65,51.5 65,40.5 67,38.5 R57.2 75.5,38.5 76.5,39.5 76.5,42 75.5,43 73.5,43 71.95,44.55 C30.1 73,46 73.73,46.73 U5.5
VREF5
  Top 0.3: TP41.1 63.5,87.5 C38.+ 65,84.5 65,73.5 67,71.5 R71.2 75.5,71.5 76.5,72.5 76.5,75 75.5,76 73.5,76 71.95,77.55 C37.1 73,79 73.73,79.73 U6.5
VSIGAL
  Top 0.3: R12.1 44,13 43,12 R10.1 41.45,8.66 Q1.3 41.29,8.5 TP7.1
VSIGAL1
  Top 0.3: R18.1 44,46 43,45 R25.1 41.45,41.66 Q2.3 41.29,41.5 TP12.1
VSIGAL2
  Top 0.3: R32.1 44,79 43,78 R39.1 41.45,74.66 Q3.3 41.29,74.5 TP20.1
VSIGAL3
  Top 0.3: R46.1 94,13 93,12 R53.1 91.45,8.66 Q4.3 91.29,8.5 TP28.1
VSIGAL4
  Top 0.3: R60.1 94,46 93,45 R67.1 91.45,41.66 Q5.3 91.29,41.5 TP36.1
VSIGAL5
  Top 0.3: R74.1 94,79 93,78 R81.1 91.45,74.66 Q6.3 91.29,74.5 TP44.1

## Text on the board
_tNames: TP4 | TP1 | TP4 | TP1 | R4 | R4 | R2 | R3 | TP3 | TP8 | R2 | R3 | TP3 | TP8 | C6 | R1 | U1 | C6 | R1 | U1 | R9 | R11 | R9 | R11 | C3 | C3 | TP5 | C2 | TP5 | C2 | TP6 | C5 | TP6 | C5 | C4 | C7 | R12 | C4 | C7 | R12 | R8 | R10 | R8 | R10 | C1 | R6 | TP2 | TP7 | C1 | R6 | TP2 | TP7 | R7 | R7 | R14 | R14 | R13 | R13 | R5 | R5 | Q1 | Q1 | TP4 | TP1 | TP4 | TP1 | R4 | R4 | R2 | R3 | TP3 | TP8 | R2 | R3 | TP3 | TP8 | C6 | R1 | U1 | C6 | R1 | U1 | R9 | R11 | R9 | R11 | C3 | C3 | TP5 | C2 | TP5 | C2 | TP6 | TP6 | C5 | C4 | C7 | R12 | C5 | C4 | C7 | R12 | R8 | R10 | R8 | R10 | C1 | R6 | TP2 | TP7 | C1 | R6 | TP2 | TP7 | R7 | R7 | R14 | R14 | R13 | R13 | R5 | R5 | Q1 | Q1 | TP4 | TP1 | TP4 | TP1 | R4 | R4 | R2 | R3 | TP3 | TP8 | R2 | R3 | TP3 | TP8 | C6 | R1 | U1 | C6 | R1 | U1 | R9 | R11 | R9 | R11 | C3 | C3 | TP5 | C2 | TP5 | C2 | TP6 | C5 | TP6 | C5 | C4 | C7 | R12 | C4 | C7 | R12 | R8 | R10 | R8 | R10 | C1 | R6 | TP2 | TP7 | C1 | R6 | TP2 | TP7 | R7 | R7 | R14 | R14 | R13 | R13 | R5 | R5 | Q1 | Q1